# Altium PCB Arduino NG Ahuratus-PCB.PcbDoc (part 1 of 6)
Units mm, origin at the board's own origin, x right, y up, seen from the top; angles counter-clockwise.
Board outline 69 x 53.5 mm, 2 copper layers (Top Layer, Bottom Layer); 37 components, 49 nets, 193 pads, 40 vias.
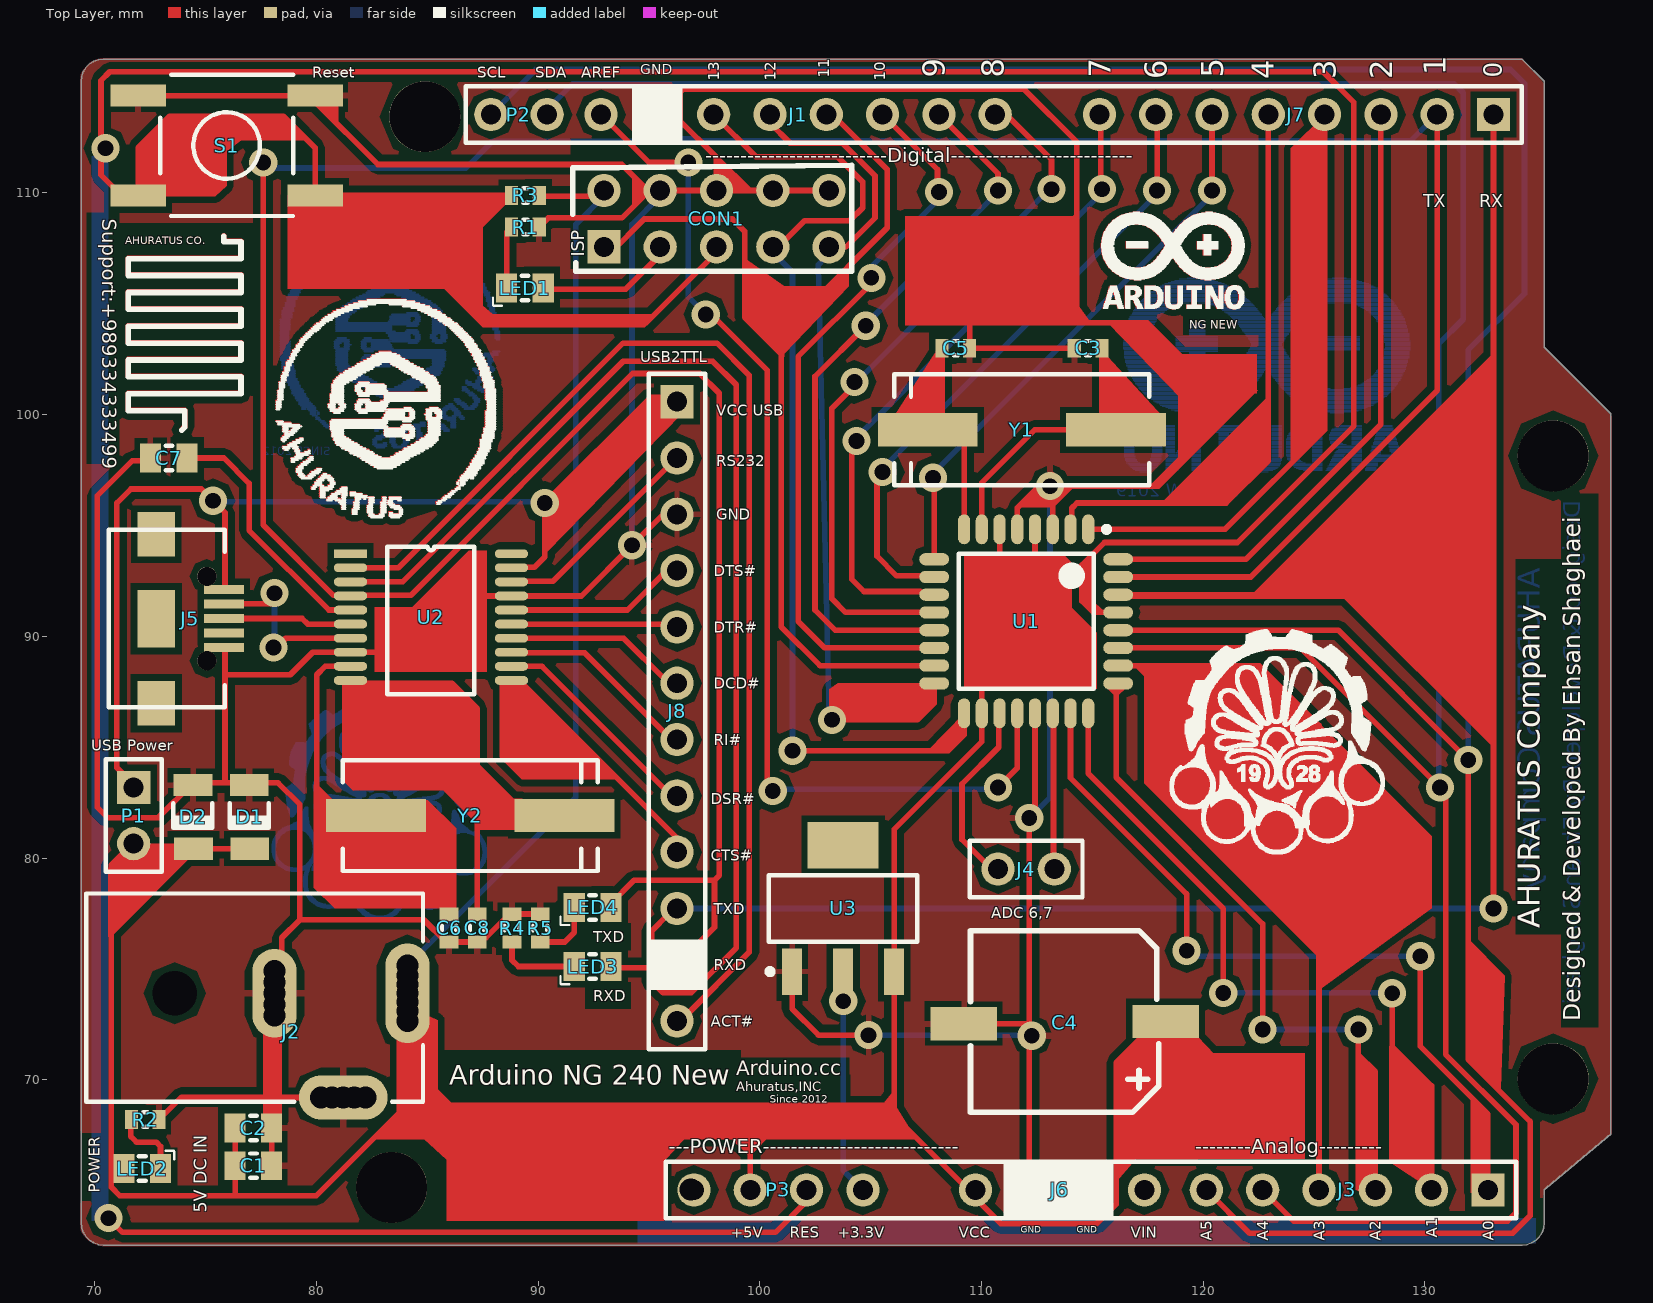
[diagram p0: Top Layer view]
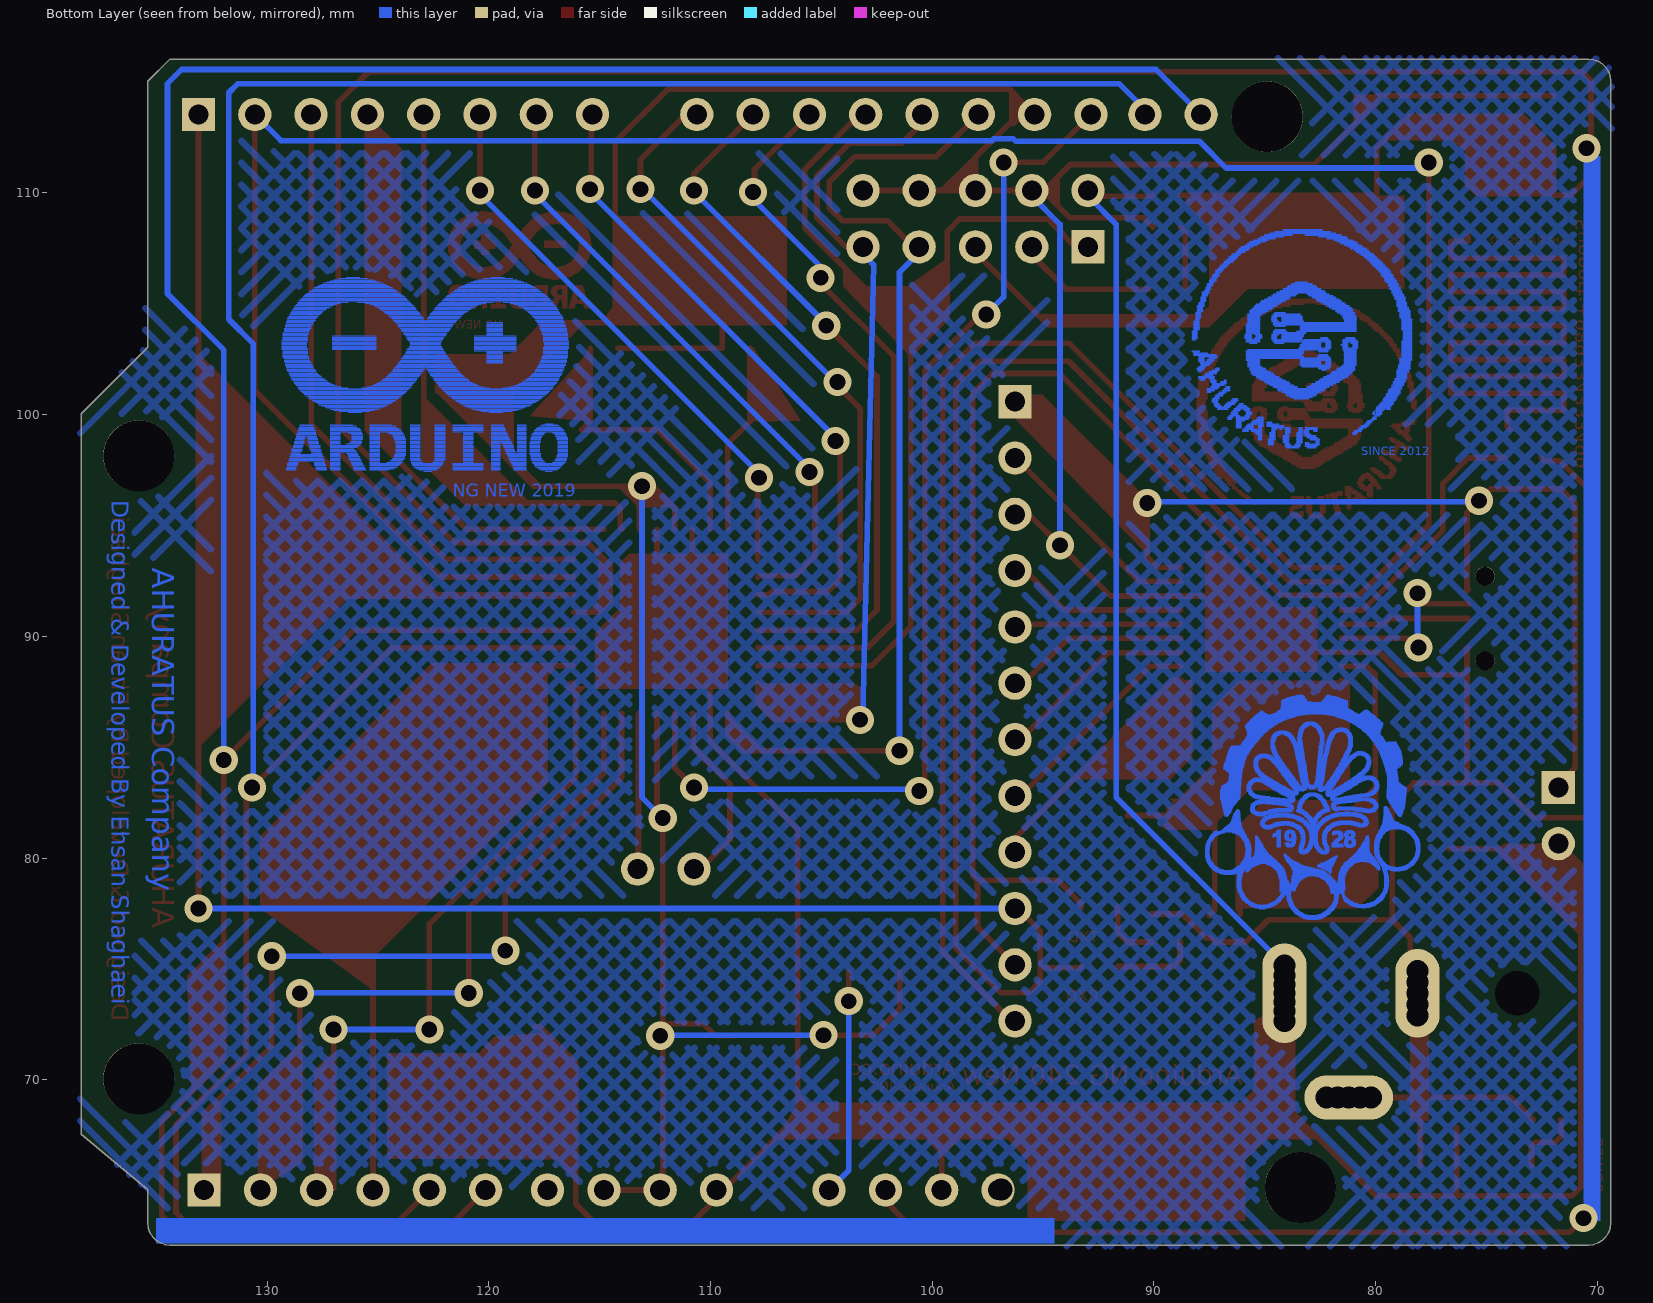
[diagram p1: Bottom Layer view, seen from below]
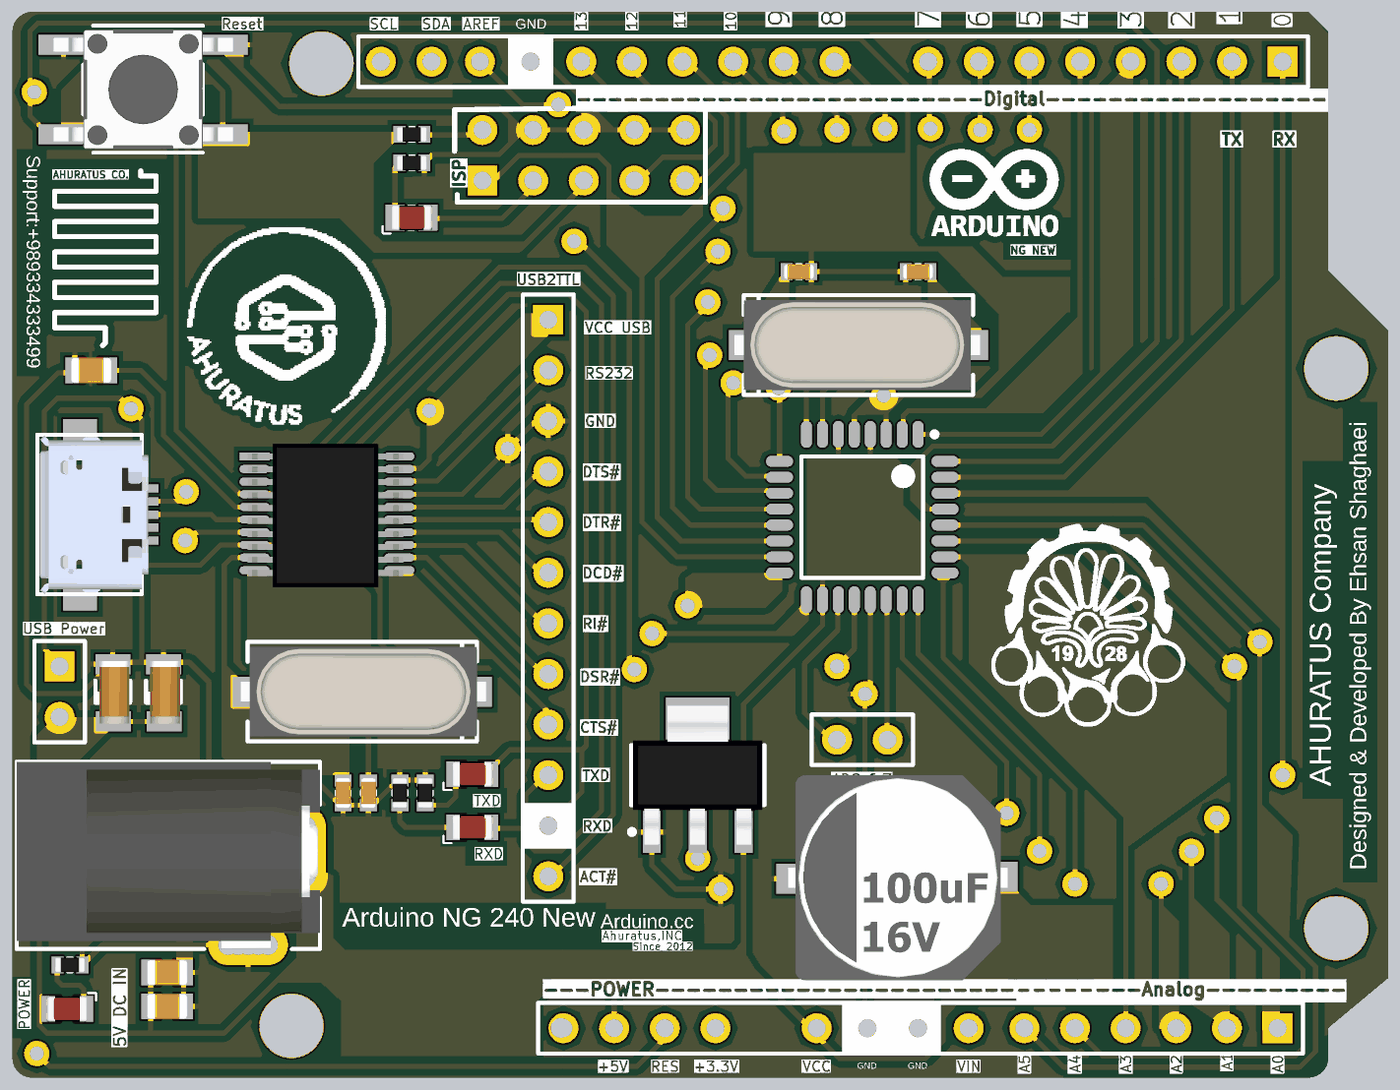
[diagram p7: 3D render of the assembled board from above, using the file's embedded part models]

## Layer stack, top to bottom
Top Solder: solder mask 0.0102, Solder Resist, Dk 3.5
Top Layer: signal copper 0.0356
Dielectric 1: dielectric 0.32, FR-4, Dk 4.8
Bottom Layer: signal copper 0.0356
Bottom Solder: solder mask 0.0102, Solder Resist, Dk 3.5

## Board outline
70.386,116.039 70.163,116.014 69.952,115.94 69.763,115.821 69.604,115.663 69.485,115.473 69.411,115.262 69.386,115.039 69.386,63.539 69.411,63.317 69.485,63.105 69.604,62.916 69.763,62.757 69.952,62.638 70.163,62.564 70.386,62.539 134.386,62.539 134.609,62.564 134.82,62.638 135.009,62.757 135.168,62.916 135.287,63.105 135.361,63.317 135.386,63.539 135.386,65.039 138.386,67.539 138.386,100.039 135.386,103.039 135.386,115.039 134.386,116.039

## Design rules (kind name [scope] priority, off if disabled: settings)
Clearance [All] p1: gap=0.3 ignorepadtopadclearanceinfootprint=FALSE
PolygonConnect [All] p1: connectstyle=Relief reliefconductorwidth=0.254 reliefentries=4 polygonreliefangle="90 Angle" airgapwidth=0.254
RoutingVias [All] p1: holewidth=0.711 width=1.27 viastyle="Through Hole" minholewidth=0.711 minwidth=1.27 maxholewidth=0.711 maxwidth=1.27
SolderMaskExpansion [All] p1: expansion=0.102
Width [All] p1: maxlimit=0.254 minlimit=0.254 preferedwidth=0.254
30 further rules are at their usual default settings.

## Components (designator, comment, footprint, x,y, rotation, side; value= is the part's Value field where it differs from the comment)
C1 "100nF" SMD_CAP_0805 76.327,66.12 r0 top
C2 "100nF" SMD_CAP_0805 76.327,67.818 r0 top
C3 "22pf" SMD_CAP_0603 114.808,102.997 r0 top
C4 "Capacitor Polarized" "Electrolytic Capacitor SMD Dia-8 - 100uf" 117.602,73.025 r180 top
C5 "22pf" SMD_CAP_0603 108.839,102.997 r180 top
C6 "22pf" SMD_CAP_0603 85.979,76.835 r90 top
C7 "100nF" SMD_CAP_0805 74.168,98.044 r180 top
C8 "22pf" SMD_CAP_0603 87.249,76.835 r90 top
CON1 "ISP" IDC2_5 92.964,107.569 r90 top
D1 "5.6V" DIOMELF3615N 76.962,81.915 r90 top
D2 "5.6V" DIOMELF3615N 74.422,81.915 r90 top
J1 "Header 8" HDR1X8#1 110.617,113.538 r180 top
J2 "Power Jack" "Power Jack" 69.605,73.898 r0 top
J3 "Header 6" HDR1X6 132.842,65.024 r180 top
J4 "Header 2" HDR1X2#1 110.744,79.502 r0 top
J5 "Micro USB" MicroUSB 72.771,90.794 r180 top
J6 "Header 4" HDR1X4 117.348,65.024 r180 top
J7 "Header 8" HDR1X8#2 133.096,113.538 r180 top
J8 "Header 12" HDR1X12 96.266,100.584 r270 top
LED1 "LED" LED0805 89.408,105.664 r180 top
LED2 "LED" LED0805 72.136,66.04 r0 top
LED3 "LED" LED0805 92.456,75.057 r180 top
LED4 "LED" LED0805 92.456,77.724 r180 top
P1 "Header 2" HDR1X2#2 71.755,83.185 r270 top
P2 "Header 2" HDR1X2#1 87.864,113.538 r0 top
P3 "Header 4" HDR1X4 104.648,65.024 r180 top
R1 "330R" "RES 0603 (1608X06L)" 88.799,108.458 r0 top
R2 "330R" "RES 0603 (1608X06L)" 71.654,68.199 r0 top
R3 "10K" "RES 0603 (1608X06L)" 90.043,109.891 r180 top
R4 "1k" "RES 0603 (1608X06L)" 88.822,76.213 r90 top
R5 "1k" "RES 0603 (1608X06L)" 90.092,76.213 r90 top
S1 "Switch PB" SW-PB 75.946,112.141 r180 top
U1 "ATmega8-16AC" 32A_L 112.014,90.678 r270 top
U2 "USB TO TTL" CH340T 81.534,93.726 r0 top
U3 "LM1117IMP-x.x" MP04A_L 103.759,77.724 r90 top
Y1 "16Mhz" "Crystal SMD" 111.252,99.314 r0 top
Y2 "12Mhz" "Crystal SMD" 87.503,81.915 r180 top

## Footprints (in the part's own frame and the unit in brackets; to place one, negate y for a bottom-side part, rotate by r counter-clockwise, add the part's x,y. Pads: shape width x height; smd on the part's side, far side on the other; paste and mask are expansions set on the pad)
32A_L [mm] "Thin QFP, 32-Leads, Body 7x7mm, Pitch 0.8mm, IPC High Density"
  oval 1.35x0.55 smd: 1(-4.15,2.8) 2(-4.15,2) 3(-4.15,1.2) 4(-4.15,0.4) 5(-4.15,-0.4) 6(-4.15,-1.2) 7(-4.15,-2) 8(-4.15,-2.8) 17(4.15,-2.8) 18(4.15,-2) 19(4.15,-1.2) 20(4.15,-0.4) 21(4.15,0.4) 22(4.15,1.2) 23(4.15,2) 24(4.15,2.8)
  oval 0.55x1.35 smd: 9(-2.8,-4.15) 10(-2,-4.15) 11(-1.2,-4.15) 12(-0.4,-4.15) 13(0.4,-4.15) 14(1.2,-4.15) 15(2,-4.15) 16(2.8,-4.15) 25(2.8,4.15) 26(2,4.15) 27(1.2,4.15) 28(0.4,4.15) 29(-0.4,4.15) 30(-1.2,4.15) 31(-2,4.15) 32(-2.8,4.15)
  silkscreen extent -4.27,-3.05 3.05,3.75, body extent -3.5,-3.5 3.5,3.5, height 1.2
CH340T [mm]
  rect 1.5x0.399 smd: 1(0,0)
  oval 1.5x0.399 smd: 2(0,-0.635) 3(0,-1.27) 4(0,-1.905) 5(0,-2.54) 6(0,-3.175) 7(0,-3.81) 8(0,-4.445) 9(0,-5.08) 10(0,-5.715) 11(7.26,-5.715) 12(7.26,-5.08) 13(7.26,-4.445) 14(7.26,-3.81) 15(7.26,-3.175) 16(7.26,-2.54) 17(7.26,-1.905) 18(7.26,-1.27) 19(7.26,-0.635) 20(7.26,0)
  silkscreen extent 1.65,-6.35 5.59,0.32, body extent -0.34,-6.56 7.46,0.64, height 1.2
"Crystal SMD" [mm]
  rect 4.5x1.5 smd: 1(-3.683,0) 2(4.817,0)
  silkscreen extent -5.18,-2.5 6.32,2.5, body extent -5.64,-2.25 6.66,2.25, height 5.18
DIOMELF3615N [mm] "MELF Diode, 2-Leads, Body 3.6x1.5mm, IPC Medium Density"
  rect 1x1.75 smd: 1(-1.495,-0.03) 2(1.38,-0.005)
  silkscreen extent -0.55,-0.87 0.55,0.87, body extent -1.61,-0.83 1.54,0.67, height 1.45
"Electrolytic Capacitor SMD Dia-8 - 100uf" [mm] "100uf,6.3v,16v"
  rect 3x1.5 smd: 1(-0.7,0.4) 2(8.4,0.5)
  silkscreen extent -0.4,-3.7 8.1,4.5, body extent -1.7,-4.7 9.3,5.6, height 7.9
HDR1X2#1 [mm] "Connector; Header; 2 Position"
  round 1.5 hole 0.9: 1(0,0) 2(2.54,0)
  silkscreen extent -1.27,-1.27 3.81,1.27
HDR1X2#2 [mm] "Connector; Header; 2 Position"
  rect 1.5x1.5 hole 0.9: 1(0,0)
  round 1.5 hole 0.9: 2(2.54,0)
  silkscreen extent -1.27,-1.27 3.81,1.27
HDR1X4 [mm] "Connector; Header; 4 Position"
  round 1.5 hole 0.9: 1(0,0) 2(2.54,0) 3(5.08,0) 4(7.62,0)
  silkscreen extent -1.27,-1.27 8.89,1.27
HDR1X6 [mm] "Connector; Header; 6 Position"
  rect 1.5x1.5 hole 0.9: 1(0,0)
  round 1.5 hole 0.9: 2(2.54,0) 3(5.08,0) 4(7.62,0) 5(10.16,0) 6(12.7,0)
  silkscreen extent -1.27,-1.27 14.22,1.27
HDR1X8#1 [mm] "Connector; Header; 8 Position"
  round 1.5 hole 0.9: 1(0,0) 2(2.54,0) 3(5.08,0) 4(7.62,0) 5(10.16,0) 6(12.7,0) 7(15.24,0) 8(17.78,0)
  silkscreen extent -3.43,-1.27 19.05,1.27
HDR1X8#2 [mm] "Connector; Header; 8 Position"
  rect 1.5x1.5 hole 0.9: 1(0,0)
  round 1.5 hole 0.9: 2(2.54,0) 3(5.08,0) 4(7.62,0) 5(10.16,0) 6(12.7,0) 7(15.24,0) 8(17.78,0)
  silkscreen extent -1.27,-1.27 21.34,1.27
HDR1X12 [mm] "Connector; Header; 12 Position"
  rect 1.5x1.5 hole 0.9: 1(0,0)
  round 1.5 hole 0.9: 2(2.54,0) 3(5.08,0) 4(7.62,0) 5(10.16,0) 6(12.7,0) 7(15.24,0) 8(17.78,0) 9(20.32,0) 10(22.86,0) 11(25.4,0) 12(27.94,0)
  silkscreen extent -1.27,-1.27 29.21,1.27
IDC2_5 [mm]
  rect 1.5x1.5 hole 0.9: 1(0,0)
  round 1.5 hole 0.9: 2(2.54,0) 3(0,-2.54) 4(2.54,-2.54) 5(0,-5.08) 6(2.54,-5.08) 7(0,-7.62) 8(2.54,-7.62) 9(0,-10.16) 10(2.54,-10.16)
LED0805 [mm]
  rect 0.95x1.3 smd: 1(-0.822,-0.047) 2(0.828,-0.047)
  silkscreen extent -0.15,-0.6 1.45,0.75, body extent -1.03,-0.68 1.02,0.59, height 1.1
MicroUSB [mil] "MicroUSB"
  round 34 hole 34: 0(-90,74.56) 0(-90,-75.24)
  rect 66.93x78.74 smd: 1(0,150) 2(0,-150)
  rect 70.87x16 smd: 1-VBUS(-120,-52.24) 2-D-(-120,-26.24) 3-D+(-120,-0.24) 4-ID(-120,25.35) 5-GND(-120,50.94)
  rect 66.93x102.36 smd: 3(0,0)
  silkscreen extent -122,-158 84,157, body extent -135,-157 79,157, height 105
MP04A_L [mm] "SOT223, 4-Leads, Body 6.5x3.5mm, Pitch 2.3mm, Lead Span 7mm, IPC High Density"
  rect 2.1x0.9 smd: 1(-2.85,2.3) 2(-2.85,0) 3(-2.85,-2.3)
  rect 2.1x3.2 smd: 4(2.85,0)
  silkscreen extent -2.97,-3.35 1.5,3.42, body extent -3.49,-3.24 3.49,3.24, height 1.64
"Power Jack" [mm] "Power Adaptor Jack"
  round 1.5 hole 1: 1(14.5,-1.25) 1(14.5,-0.8) 1(14.5,-0.4) 1(14.5,0.4) 1(14.5,0.8) 1(14.5,1.25) 2(8.5,-1) 2(8.5,1) 2(8.5,-0.5) 2(8.5,0.5) 3(10.6,-4.7) 3(11.1,-4.7) 3(12.1,-4.7) 3(12.6,-4.7)
  oval 2x4.5 hole 1: 1(14.5,0)
  oval 2x4 hole 1: 2(8.5,0)
  oval 4x2 hole 1: 3(11.6,-4.7)
  round 1.9 hole 2: MH(4,0)
  silkscreen extent 0,-4.9 15.2,4.5, body extent 0,-4.9 15.2,4.5, height 11
"RES 0603 (1608X06L)" [mm] "Chip Resistor, 2-Leads, Body 1.6x0.8mm, IPC High Density _ (0.063W)"
  rect 0.6x0.85 smd: 1(0,0) 2(1.244,0)
  silkscreen extent 0.52,-0.33 0.72,0.33, body extent -0.14,-0.38 1.38,0.38, height 0.45
SMD_CAP_0603 [mm]
  rect 0.6x0.85 smd: 1(-0.622,0) 2(0.622,0)
  silkscreen extent -0.1,-0.33 0.1,0.33, body extent -0.76,-0.38 0.76,0.38, height 0.6
SMD_CAP_0805 [mm]
  rect 0.95x1.3 smd: 1(0,0) 2(1.65,0)
  silkscreen extent 0.67,-0.55 0.97,0.55, body extent -0.19,-0.63 1.84,0.63, height 0.65
SW-PB [mm]
  rect 2.5x1 smd: 1(-3.992,2.25) 1(3.992,2.25) 2(-3.992,-2.25) 2(3.992,-2.25)
  silkscreen extent -3,-3.2 3,3.18, body extent -4.5,-3 4.5,3, height 5

## Part data
C1 C2 C3 C5 C6 C7 C8: library part Cap-Bipolar, "Bipolar Capacitor", Voltage=100V, Adding Date=1387/12/20, Designer="Saeid Jorablo", Organazation=ControTec
D1 D2: library part "Diode Zener SMD", Designer="Hamed Jafarzadeh"
J1 J7: "Header, 8-Pin", LatestRevisionDate=17-Jul-2002, LatestRevisionNote="Re-released for DXP Platform.", Publisher="Altium Limited"
J3: "Header, 6-Pin", LatestRevisionDate=17-Jul-2002, LatestRevisionNote="Re-released for DXP Platform.", Publisher="Altium Limited"
J4 P1 P2: "Header, 2-Pin", LatestRevisionDate=17-Jul-2002, LatestRevisionNote="Re-released for DXP Platform.", Publisher="Altium Limited"
J5: library part "USB Micro", ENG="Ehsan Shaghaei"
J6 P3: "Header, 4-Pin", LatestRevisionDate=17-Jul-2002, LatestRevisionNote="Re-released for DXP Platform.", Publisher="Altium Limited"
J8: "Header, 12-Pin", LatestRevisionDate=17-Jul-2002, LatestRevisionNote="Re-released for DXP Platform.", Publisher="Altium Limited"
R1 R2 R3 R4 R5: library part Resistor, "Resistor"
S1: "Push Button Switch"
U1: "8-Bit AVR Microcontroller with 8K Bytes of In-System Programmable Flash Memory", Code_JEDEC=MS-026-ABA, ComponentLink1Description="Manufacturer Link", ComponentLink1URL=http://www.atmel.com, ComponentLink2Description=Datasheet, ComponentLink2URL=http://www.atmel.com/dyn/resources/prod_documents/doc2486.pdf, DatasheetVersion=2486H-AVR-09/02, LatestRevisionDate=13-Apr-2006, LatestRevisionNote="IPC-7351 Footprint Added.", PackageDescription="32-Pin Thin Quad Flat Pack 0.8 mm Pitch", PackageReference=32A, PackageVersion="revB, Oct-2001", Published=17-Sep-2003, Publisher="Altium Limited"
U2: library part CH340T, Designer="Ehsan Shaghaei", Web site=www.dregg.com
U3: "x.x Volt, 800mA Low-Dropout Linear Regulator, 4-pin SOT-223", Manufacturer="National Semiconductor", PackageTopMarking=XYTT*N05B, PartNumber=LM1117IMP-3.3, PowerWise=N, Supplier Part Number 1=7614123, Code_IPC=SOT223-4, Code_JEDEC=TO-261-AA, ComponentLink1Description="LM1117 Datasheet", ComponentLink1URL=http://www.national.com/ds/LM/LM1117.pdf, ComponentLink2Description="LM1117 Web Page", ComponentLink2URL=http://www.national.com/pf/LM/LM1117.html, ComponentLink3Description="MP04A Package Page", ComponentLink3URL=http://www.national.com/packaging/folders/mp04a.html, CompType="LDO IC", DatasheetVersion=Apr-2006, PackageDescription="Molded SOT-223, 6.50 x 3.56 x 1.6mm Body, 4 Lead, 2.3mm Pitch", PackageReference=MP04A, PackageVersion="revB, Apr-2003", PinCount=4, Published=4-Dec-2008, Publisher="Altium Limited", RoHS=N, Supplier 1=Farnell
Y1 Y2: library part XTAL, "XTAL Crystal", Company=E.P.I.L, Design Date=11/04/2011
C4: Designer="Hamed Jafarzadeh ( R2T )"
J2: Adding Date=10/21/2009, Company=Personal, Designer="Saeid Jorablo", Project Name=Laser
LED1 LED2 LED3 LED4: Designer="Razi Research Team Of Mashhad - Hamed Jafarzadeh"

## Free pads (board coordinates)
  round 3.2 hole 3.2: 1(83.386,65.139) 1(84.886,113.439) 1(135.786,70.039) 1(135.786,98.139)
  round 1 hole 1: 1(96.886,65.039)

## Via types
v1: diameter 1.27, hole 0.711, Top Layer to Bottom Layer, 40 vias

## Nets (pads, with @x,y where several pads share a name; then routed paths per layer and width w, separated by ;. In a path a pad name is that pad's centre, name@x,y a point inside that pad or via, vN(x,y) a via of type N, cw(c..) or ccw(c..) an arc to the next point about the centre after c; other vN are vias at no path point)
+3.3V: P3.1 U3.2 | length 10.2
  Top Layer w0.254: v1(103.759,73.542) U3.2@103.759,74.874
  Bottom Layer w0.254: v1(103.759,73.542) 103.759,65.913 P3.1@104.648,65.024
ACT#: J8.12 U2.2 | length 53.7
  Top Layer w0.254: U2.2@81.534,93.091 83.693,93.091 93.828,103.226 98.069,103.226 99.522,101.773 99.522,75.752 96.541,72.771 J8.12@95.885,72.771
AREF: J1.8 U1.20 | length 49
  Top Layer w0.254: J1.8@92.837,113.538 94.996,111.379 v1(96.774,111.379) ; v1(97.557,104.521) 97.815,104.521 100.33,102.006 100.33,83.28 v1(100.584,83.026) ; v1(110.744,83.185) 111.614,84.055 U1.20@111.614,86.528
  Bottom Layer w0.254: v1(96.774,111.379) 96.774,105.304 v1(97.557,104.521) v1@97.409,104.521 ; v1(100.584,83.026) 100.664,83.105 110.664,83.105 v1(110.744,83.185)
D+: J5.3-D+ U2.6 | length 5.8
  Top Layer w0.254: J5.3-D+@75.819,90.8 75.824,90.805 79.35,90.805 79.604,90.551 U2.6@81.534,90.551
D-: J5.2-D- U2.7 | length 8.9
  Top Layer w0.254: J5.2-D-@75.819,91.46 75.826,91.467 78.056,91.467 78.105,91.516 v1(78.105,91.948) ; v1(78.056,89.5) 78.197,89.5 78.613,89.916 U2.7@81.534,89.916
  Bottom Layer w0.254: v1(78.056,89.5) 78.105,89.549 v1(78.105,91.948)
GND: C1.2 C2.2 C3.1 C4.2 C5.1 C6.1 C7.2 C8.1 CON1.4 CON1.6 CON1.8 CON1.10 D1.2 D2.2 J1.7 J2.2 J2.3 J5.5-GND J6.2 J6.3 J8.3 R1.2 R2.2 R4.2 R5.2 S1.2 U1.3 U1.5 U1.21 U2.8 U2.17 U3.1 | length 270.5
  Top Layer w0.254: S1.2@71.954,114.391 S1.2@79.938,114.391 79.938,114.118 82.77,111.286 93.772,111.286 94.981,110.077 93.779,108.875 90.46,108.875 R1.2@90.043,108.458 ; C7.2@72.518,98.044 72.391,97.917 71.683,97.917 70.104,96.338 70.104,82.296 70.578,81.822 72.861,81.822 74.427,83.388 75.87,83.388 ; R2.2@72.898,68.199 73.914,69.215 77.958,69.215 ; J5.5-GND@75.819,89.5 75.87,89.449 75.87,88.265 ; C1.2@77.977,66.12 C2.2@77.977,67.818 77.977,69.197 77.978,69.198 ; J2.2@78.105,72.898 77.978,72.771 77.978,69.198 ; J2.2@78.105,73.898 J2.2@78.105,74.898 ; J2.2@78.434,74.915 78.434,76.402 79.248,77.216 ; J2.3@81.705,69.198 J2.3@81.205,69.198 J2.3@80.705,69.198 J2.3@80.205,69.198 77.978,69.198 ; C8.1@87.249,76.206 86.874,76.206 86.868,76.213 C6.1@85.979,76.213 85.839,76.213 84.836,77.216 79.248,77.216 ; C8.1@87.249,76.213 87.422,76.386 87.625,76.386 88.697,77.457 R4.2@88.822,77.457 ; R4.2@88.822,77.476 R5.2@90.092,77.476 ; CON1.4@95.203,109.855 95.457,110.109 CON1.4@95.504,110.109 CON1.6@98.044,110.109 98.044,111.611 96.355,113.3 95.615,113.3 J1.7@95.377,113.538 ; J1.7@95.758,113.919 96.52,114.681 111.912,114.681 114.3,112.293 114.3,104.14 ; J8.3@95.948,95.567 95.694,95.567 v1(94.234,94.107) 91.948,91.821 U2.17@88.794,91.821 86.36,91.821 83.82,89.281 U2.8@81.534,89.281 79.832,89.281 78.816,88.265 75.87,88.265 ; CON1.6@98.044,109.855 98.069,109.858 98.182,109.996 98.275,110.109 CON1.10@103.124,110.109 ; U3.1@101.459,74.874 101.459,73.194 102.644,72.009 v1(104.902,72.009) ; C4.2@108.948,71.983 109.778,71.983 110.312,72.517 112.014,72.517 v1@112.153,72.378 ; U1.5@111.614,94.828 111.614,95.797 112.591,96.774 v1(113.087,96.774) 113.087,97.155 v1@113.214,97.028 ; v1(112.268,71.983) v1@112.153,71.983 ; U1.21@112.414,86.528 112.414,82.061 v1(112.153,81.8) v1@112.153,72.378 ; U1.3@113.214,94.828 v1@113.214,97.028 ; v1@113.214,97.282 v1@113.214,97.028 ; C3.1@114.186,102.997 C5.1@109.461,102.997 109.461,104.14 114.3,104.14 ; J6.2@114.808,65.024 J6.3@112.268,65.024 112.153,65.024 v1@112.153,71.983 ; 75.87,83.388 78.266,83.388 79.248,82.406 79.248,77.216 ; 75.87,83.388 75.87,88.265 ; v1@112.153,71.983 v1@112.153,72.378 ; v1@113.214,97.028 113.468,96.774 117.729,96.774 118.999,98.044 118.999,102.616 117.475,104.14 114.3,104.14
  Bottom Layer w0.254: v1(94.234,94.107) 94.234,108.585 CON1.4@95.504,109.855 ; v1(104.902,72.009) 111.937,72.009 v1(112.268,71.983) ; v1(112.153,81.8) 113.087,82.734 v1(113.087,96.774)
MISO: CON1.9 J1.5 U1.16 | length 37.4
  Top Layer w0.254: J1.5@100.457,113.538 100.457,113.157 101.37,112.244 103.728,112.244 105.193,110.779 105.193,108.876 103.886,107.569 CON1.9@103.124,107.569 ; v1(103.251,86.233) 107.114,86.233 107.864,86.983 U1.16@107.864,87.878
  Bottom Layer w0.254: CON1.9@102.87,107.01 102.63,106.758 103.124,86.36 v1(103.251,86.233)
MOSI: CON1.1 J1.4 U1.15 | length 46.5
  Top Layer w0.254: CON1.1@92.964,107.315 93.277,107.315 94.787,108.824 98.764,108.824 99.314,108.274 99.314,105.346 ; 102.87,105.346 99.314,105.346 ; J1.4@102.997,113.538 103.272,113.538 105.747,111.063 105.747,108.431 103.967,106.651 ; 103.759,105.791 103.759,106.426 103.8,106.467 ; U1.15@107.864,88.678 102.711,88.678 100.965,90.424 100.965,102.743 99.314,104.394 99.314,105.346
NetC3_2: C3.2 U1.7 Y1.2 | length 12.7
  Top Layer w0.254: U1.7@110.014,94.828 110.014,96.933 112.395,99.314 115.824,99.314 115.43,99.708 C3.2@115.43,102.997
NetC5_2: C5.2 U1.8 Y1.1 | length 8.6
  Top Layer w0.254: C5.2@108.217,102.997 108.217,99.688 109.214,98.691 U1.8@109.214,94.828
NetC6_2: C6.2 U2.9 Y2.2 | length 16.7
  Top Layer w0.254: U2.9@81.534,88.646 80.391,88.646 80.01,88.265 80.01,83.185 81.026,82.169 83.947,82.169 86.106,80.01 C6.2@86.106,77.457
NetC7_1: C7.1 U2.5 | length 11.4
  Top Layer w0.254: C7.1@74.168,98.044 75.819,98.044 76.962,96.901 76.962,94.782 80.558,91.186 U2.5@81.534,91.186
NetC8_2: C8.2 U2.10 Y2.1 | length 19.9
  Top Layer w0.254: U2.10@81.534,88.011 81.407,87.884 81.534,87.884 86.106,87.884 87.249,86.741 87.249,81.915 ; C8.2@87.503,77.408 87.249,77.662 87.249,81.915 ; Y2.1@91.186,81.915 87.249,81.915
NetCON1_3: CON1.3 LED1.1 | length 6
  Top Layer w0.254: LED1.1@90.23,105.664 93.953,105.664 95.504,107.215 CON1.3@95.504,107.315
NetJ1_1: J1.1 U1.12 | length 31.6
  Top Layer w0.254: v1(104.267,101.473) 104.267,101.306 103.251,100.29 103.251,91.694 103.867,91.078 U1.12@107.864,91.078 ; J1.1@111.252,113.411 113.157,111.506 v1(113.157,110.172)
  Bottom Layer w0.254: v1(104.267,101.473) 104.362,101.473 113.062,110.172 v1(113.157,110.172)
NetJ1_2: J1.2 U1.13 | length 32.8
  Top Layer w0.254: v1(104.775,104.013) 102.489,101.727 102.489,91.186 103.397,90.278 U1.13@107.864,90.278 ; J1.2@108.204,113.665 108.204,113.411 110.744,110.871 v1(110.744,110.109) v1@110.68,110.172
  Bottom Layer w0.254: v1(104.775,104.013) 104.775,104.076 110.744,110.045 v1(110.744,110.109)
NetJ1_3: J1.3 U1.14 | length 33.2
  Top Layer w0.254: v1(105.029,106.172) 105.029,105.918 101.727,102.616 101.727,90.678 102.927,89.478 U1.14@107.864,89.478 ; J1.3@105.537,113.538 108.013,111.061 108.013,110.109 v1(108.077,110.045)
  Bottom Layer w0.254: v1(105.029,106.172) 105.029,106.68 108.077,109.728 v1(108.077,110.045)
NetJ3_1: J3.1 U1.23 | length 35.2
  Top Layer w0.254: U1.23@114.014,86.528 114.014,83.616 119.253,78.377 v1@119.253,75.946 ; v1(129.794,75.565) 129.794,71.501 132.842,68.453 J3.1@132.842,65.024
  Bottom Layer w0.254: v1(119.253,75.819) 119.507,75.565 v1(129.794,75.565)
NetJ3_2: J3.2 U1.24 | length 32.4
  Top Layer w0.254: U1.24@114.814,86.528 114.814,83.814 120.904,77.724 v1(120.904,73.914) ; v1(128.524,73.898) 128.524,71.501 130.302,69.723 J3.2@130.302,65.024
  Bottom Layer w0.254: v1(120.904,73.914) 128.508,73.914 v1(128.524,73.898)
NetJ3_3: J3.3 U1.25 | length 30.5
  Top Layer w0.254: U1.25@116.164,87.878 116.3,87.878 116.232,87.81 116.078,87.656 116.078,83.631 122.682,77.027 v1(122.682,72.263) ; v1(127,72.263) 127,71.12 127.762,70.358 J3.3@127.762,65.024
  Bottom Layer w0.254: v1(122.682,72.263) v1(127,72.263)
NetJ3_4: J3.4 U1.26 | length 31.1
  Top Layer w0.254: U1.26@116.164,88.678 122.523,88.678 125.222,85.979 J3.4@125.222,65.024
NetJ4_1: J4.1 U1.19 | length 8.6
  Top Layer w0.254: J4.1@110.744,79.502 110.446,79.502 109.121,80.827 109.121,83.34 110.779,84.998 110.779,86.493 U1.19@110.814,86.528
NetJ4_2: J4.2 U1.22 | length 7
  Top Layer w0.254: U1.22@113.214,86.528 113.249,86.493 J4.2@113.249,79.502
NetJ5_1-VBUS: J5.1-VBUS J8.1 P1.1 U2.19 | length 49.2
  Top Layer w0.254: P1.1@72.009,83.058 71.628,83.439 70.993,84.074 70.993,96.012 71.628,96.647 74.803,96.647 v1(75.336,96.114) 75.87,95.58 75.87,92.07 J5.1-VBUS@75.819,92.121 ; U2.19@88.794,93.091 88.822,93.119 89.834,93.119 90.297,93.582 v1(90.297,96.012) 95.059,100.774 J8.1@95.822,100.774
  Bottom Layer w0.254: v1(75.336,96.114) 75.387,96.063 90.246,96.063 v1(90.297,96.012)
NetJ7_3: J7.3 U1.32 | length 28.3
  Top Layer w0.254: U1.32@116.164,93.478 121.926,93.478 128.016,99.568 J7.3@128.016,113.538
NetJ7_4: J7.4 U1.1 | length 26.7
  Top Layer w0.254: U1.1@114.814,94.828 120.99,94.828 125.476,99.314 J7.4@125.476,113.538
NetJ7_5: J7.5 U1.2 | length 26.3
  Top Layer w0.254: U1.2@114.014,94.828 114.071,94.885 114.071,95.777 114.306,96.012 121.031,96.012 122.936,97.917 J7.5@122.936,113.538
NetJ7_6: J7.6 U1.9 | length 25.3
  Top Layer w0.254: v1(107.814,97.155) 107.864,97.105 U1.9@107.864,93.478 ; v1(120.396,110.109) J7.6@120.396,113.538
  Bottom Layer w0.254: v1(107.814,97.155) 107.814,97.341 120.396,109.923 v1(120.396,110.109)
NetJ7_7: J7.7 U1.10 | length 28.4
  Top Layer w0.254: v1(105.537,97.409) 105.283,97.155 105.283,93.617 106.172,92.728 107.814,92.728 U1.10@107.864,92.678 ; J7.7@117.856,113.538 117.602,113.284 117.921,112.965 v1(117.921,110.109)
  Bottom Layer w0.254: v1(105.537,97.409) 105.537,97.567 117.921,109.951 v1(117.921,110.109)
NetJ7_8: J7.8 U1.11 | length 29.7
  Top Layer w0.254: v1(104.362,98.806) 104.14,98.584 104.14,92.581 104.699,92.022 107.24,92.022 107.384,91.878 U1.11@107.864,91.878 ; J7.8@115.316,113.538 115.373,113.481 115.373,110.23 v1(115.43,110.172)
  Bottom Layer w0.254: v1(104.362,98.806) 104.362,98.955 115.43,110.023 v1(115.43,110.172)
NetJ8_2: J8.2 U2.18 | length 9.7
  Top Layer w0.254: U2.18@88.794,92.456 88.822,92.484 90.67,92.484 96.012,97.825 J8.2@96.012,98.044
NetJ8_4: J8.4 U2.16 | length 7.9
  Top Layer w0.254: U2.16@88.794,91.186 94.024,91.186 J8.4@95.907,93.069
NetJ8_5: J8.5 U2.15 | length 7.1
  Top Layer w0.254: U2.15@88.794,90.551 J8.5@95.885,90.551
NetJ8_6: J8.6 U2.14 | length 7.9
  Top Layer w0.254: U2.14@88.794,89.916 93.853,89.916 95.694,88.075 J8.6@95.948,88.075
NetJ8_7: J8.7 U2.13 | length 8.7
  Top Layer w0.254: U2.13@88.794,89.281 88.822,89.253 92.103,89.253 J8.7@95.885,85.471
NetJ8_8: J8.8 U2.12 | length 9.5
  Top Layer w0.254: U2.12@88.794,88.646 90.17,88.646 J8.8@95.885,82.931
NetJ8_9: J8.9 U2.11 | length 11.1
  Top Layer w0.254: U2.11@88.794,88.011 89.154,88.011 96.266,80.899 96.266,80.772 J8.9@95.885,80.391
NetLED1_2: LED1.2 R1.1 | length 2.8
  Top Layer w0.254: LED1.2@88.58,105.711 88.58,108.239 R1.1@88.799,108.458
NetLED2_2: LED2.2 R2.1 | length 3.2
  Top Layer w0.254: R2.1@71.654,68.199 71.628,68.173 71.628,67.437 71.882,67.183 72.771,67.183 72.964,66.99 LED2.2@72.964,66.12
NetLED3_2: LED3.2 R4.1 | length 3.7
  Top Layer w0.254: R4.1@88.822,76.213 88.822,75.389 89.107,75.104 LED3.2@91.628,75.104
NetLED4_2: LED4.2 R5.1 | length 2.8
  Top Layer w0.254: R5.1@90.092,76.213 91.199,76.213 91.628,76.642 LED4.2@91.628,77.771
RST: CON1.5 P3.2 R3.2 S1.1 U1.29 | length 219.6
  Top Layer w0.254: v1(70.612,63.754) 71.254,63.112 100.704,63.112 102.108,64.516 P3.2@102.108,65.024 ; R3.2@88.799,109.891 82.26,109.891 ; CON1.5@98.044,107.315 94.869,104.14 88.011,104.14 83.388,108.763 82.26,109.891 ; U1.29@116.164,91.078 115.043,91.078 114.532,91.589 114.532,93.218 115.548,94.234 121.539,94.234 126.797,99.492 126.797,114.086 125.417,115.466 70.675,115.466 70.277,115.068 70.277,112.222 v1(70.485,112.014) 70.277,111.806 70.277,110.818 71.204,109.891 S1.1@71.954,109.891 71.954,112.037 73.38,113.464 78.512,113.464 79.938,112.037 S1.1@79.938,109.891 82.26,109.891
  Bottom Layer w0.254: v1(70.485,112.014) 70.485,63.881 v1(70.612,63.754)
RXD-m8: J7.1 J8.10 LED3.1 U1.30 U2.3 | length 152
  Top Layer w0.254: U2.3@81.534,92.456 83.888,92.456 93.84,102.408 97.871,102.408 98.933,101.346 98.933,75.946 96.901,73.914 95.631,73.914 95.123,74.422 95.123,75.057 ; LED3.1@93.278,75.104 93.325,75.057 95.123,75.057 ; J8.10@95.885,77.851 95.885,77.47 95.123,76.708 95.123,75.057 ; U1.30@116.164,91.878 122.358,91.878 133.096,102.616 ; v1(133.096,77.724) 133.096,102.616 ; J7.1@133.096,113.538 133.096,102.616
  Bottom Layer w0.254: J8.10@96.266,77.724 132.969,77.724 133.096,77.597 v1(133.096,77.724)
SCK: CON1.7 J1.6 U1.17 | length 45.9
  Top Layer w0.254: J1.6@97.917,113.538 99.822,111.633 103.505,111.633 104.639,110.499 104.639,109.333 104.051,108.746 102.015,108.746 CON1.7@100.584,107.315 ; v1(101.473,84.836) 108.491,84.836 109.214,85.559 U1.17@109.214,86.528
  Bottom Layer w0.254: CON1.7@100.584,107.315 101.473,106.426 v1(101.473,84.836)
SCL: J3.6 P2.1 U1.28 | length 135
  Top Layer w0.254: U1.28@116.164,90.278 126.091,90.278 v1(131.953,84.416) 131.953,70.909 134.747,68.115 134.747,63.86 133.96,63.073 122.093,63.073 J3.6@120.142,65.024
  Bottom Layer w0.254: P2.1@87.864,113.538 89.896,115.57 133.858,115.57 134.493,114.935 134.493,105.452 131.953,102.912 v1(131.953,84.416)
SDA: J3.5 P2.2 U1.27 | length 123.9
  Top Layer w0.254: U1.27@116.164,89.478 124.39,89.478 v1(130.683,83.185) 130.937,82.931 130.937,71.141 134.112,67.966 134.112,64.008 133.731,63.627 124.079,63.627 J3.5@122.682,65.024
  Bottom Layer w0.254: P2.2@90.404,113.538 90.404,113.772 91.567,114.935 131.318,114.935 131.733,114.52 131.733,104.301 130.619,103.188 130.619,83.248 v1(130.683,83.185)
TXD-m8: J7.2 J8.11 LED4.1 U1.31 U2.4 | length 158.9
  Top Layer w0.254: v1(77.597,111.379) 77.597,95.022 80.77,91.849 81.506,91.849 U2.4@81.534,91.821 81.562,91.849 84.254,91.849 94.259,101.854 97.282,101.854 98.171,100.965 98.171,79.208 97.957,78.994 ; LED4.1@93.278,77.771 93.278,77.946 94.326,78.994 97.957,78.994 ; J8.11@96.393,75.311 97.957,76.875 97.957,78.994 ; U1.31@116.164,92.678 122.142,92.678 130.556,101.092 J7.2@130.556,113.538
  Bottom Layer w0.254: v1(77.597,111.379) 77.851,111.125 86.741,111.125 87.947,112.331 96.224,112.331 96.334,112.441 97.214,112.441 97.294,112.361 129.379,112.361 J7.2@130.556,113.538
VCC: C1.1 C2.1 C4.1 CON1.2 D1.1 D2.1 J2.1 J6.4 LED2.1 P1.2 P3.3 R3.1 U1.4 U1.6 U1.18 U3.3 | length 165.2
  Top Layer w0.254: C2.1@76.327,67.818 C1.1@76.327,66.12 76.327,64.77 ; D1.1@76.666,80.42 D2.1@74.452,80.42 71.599,80.42 71.374,80.645 71.374,80.316 70.739,79.681 70.739,65.151 71.12,64.77 76.327,64.77 ; J2.1@84.105,74.698 J2.1@84.105,74.298 J2.1@84.105,73.898 J2.1@84.105,73.498 J2.1@84.105,73.098 J2.1@84.105,72.648 J2.1@84.135,72.678 ; J2.1@84.414,72.156 84.414,69.19 ; R3.1@90.043,109.891 90.079,109.855 CON1.2@92.964,109.855 ; 99.457,68.072 99.568,67.961 P3.3@99.568,65.024 ; 106.045,68.961 105.791,68.707 84.414,68.707 84.414,69.19 ; J6.4@109.728,65.024 109.414,65.024 106.059,68.379 106.059,68.961 U3.3@106.059,74.874 106.059,81.294 110.014,85.249 U1.18@110.014,86.528 110.014,87.916 110.814,88.716 110.814,93.345 112.141,93.345 112.414,93.618 U1.4@112.414,94.828 ; J6.4@109.855,64.897 109.855,64.516 110.871,63.5 115.189,63.5 116.078,64.389 116.078,70.77 117.698,72.39 C4.1@117.921,72.39 ; 110.814,93.392 U1.6@110.814,94.828 ; 76.327,64.77 79.994,64.77 84.414,69.19
  Bottom Layer w0.254: J2.1@84.105,74.298 84.905,75.098 84.675,75.327 84.675,75.718 91.694,82.737 91.694,108.585 CON1.2@92.964,109.855
VIN: J6.1 | length 0.2
  Top Layer w0.254: J6.1@117.221,65.024 117.294,65.087 J6.1@117.348,65.133
pads on no net: J2.MH J5.0 J5.1 J5.2 J5.3 J5.4-ID P3.4 U2.1 U2.20 U3.4